# Allegro board CAD4.brd
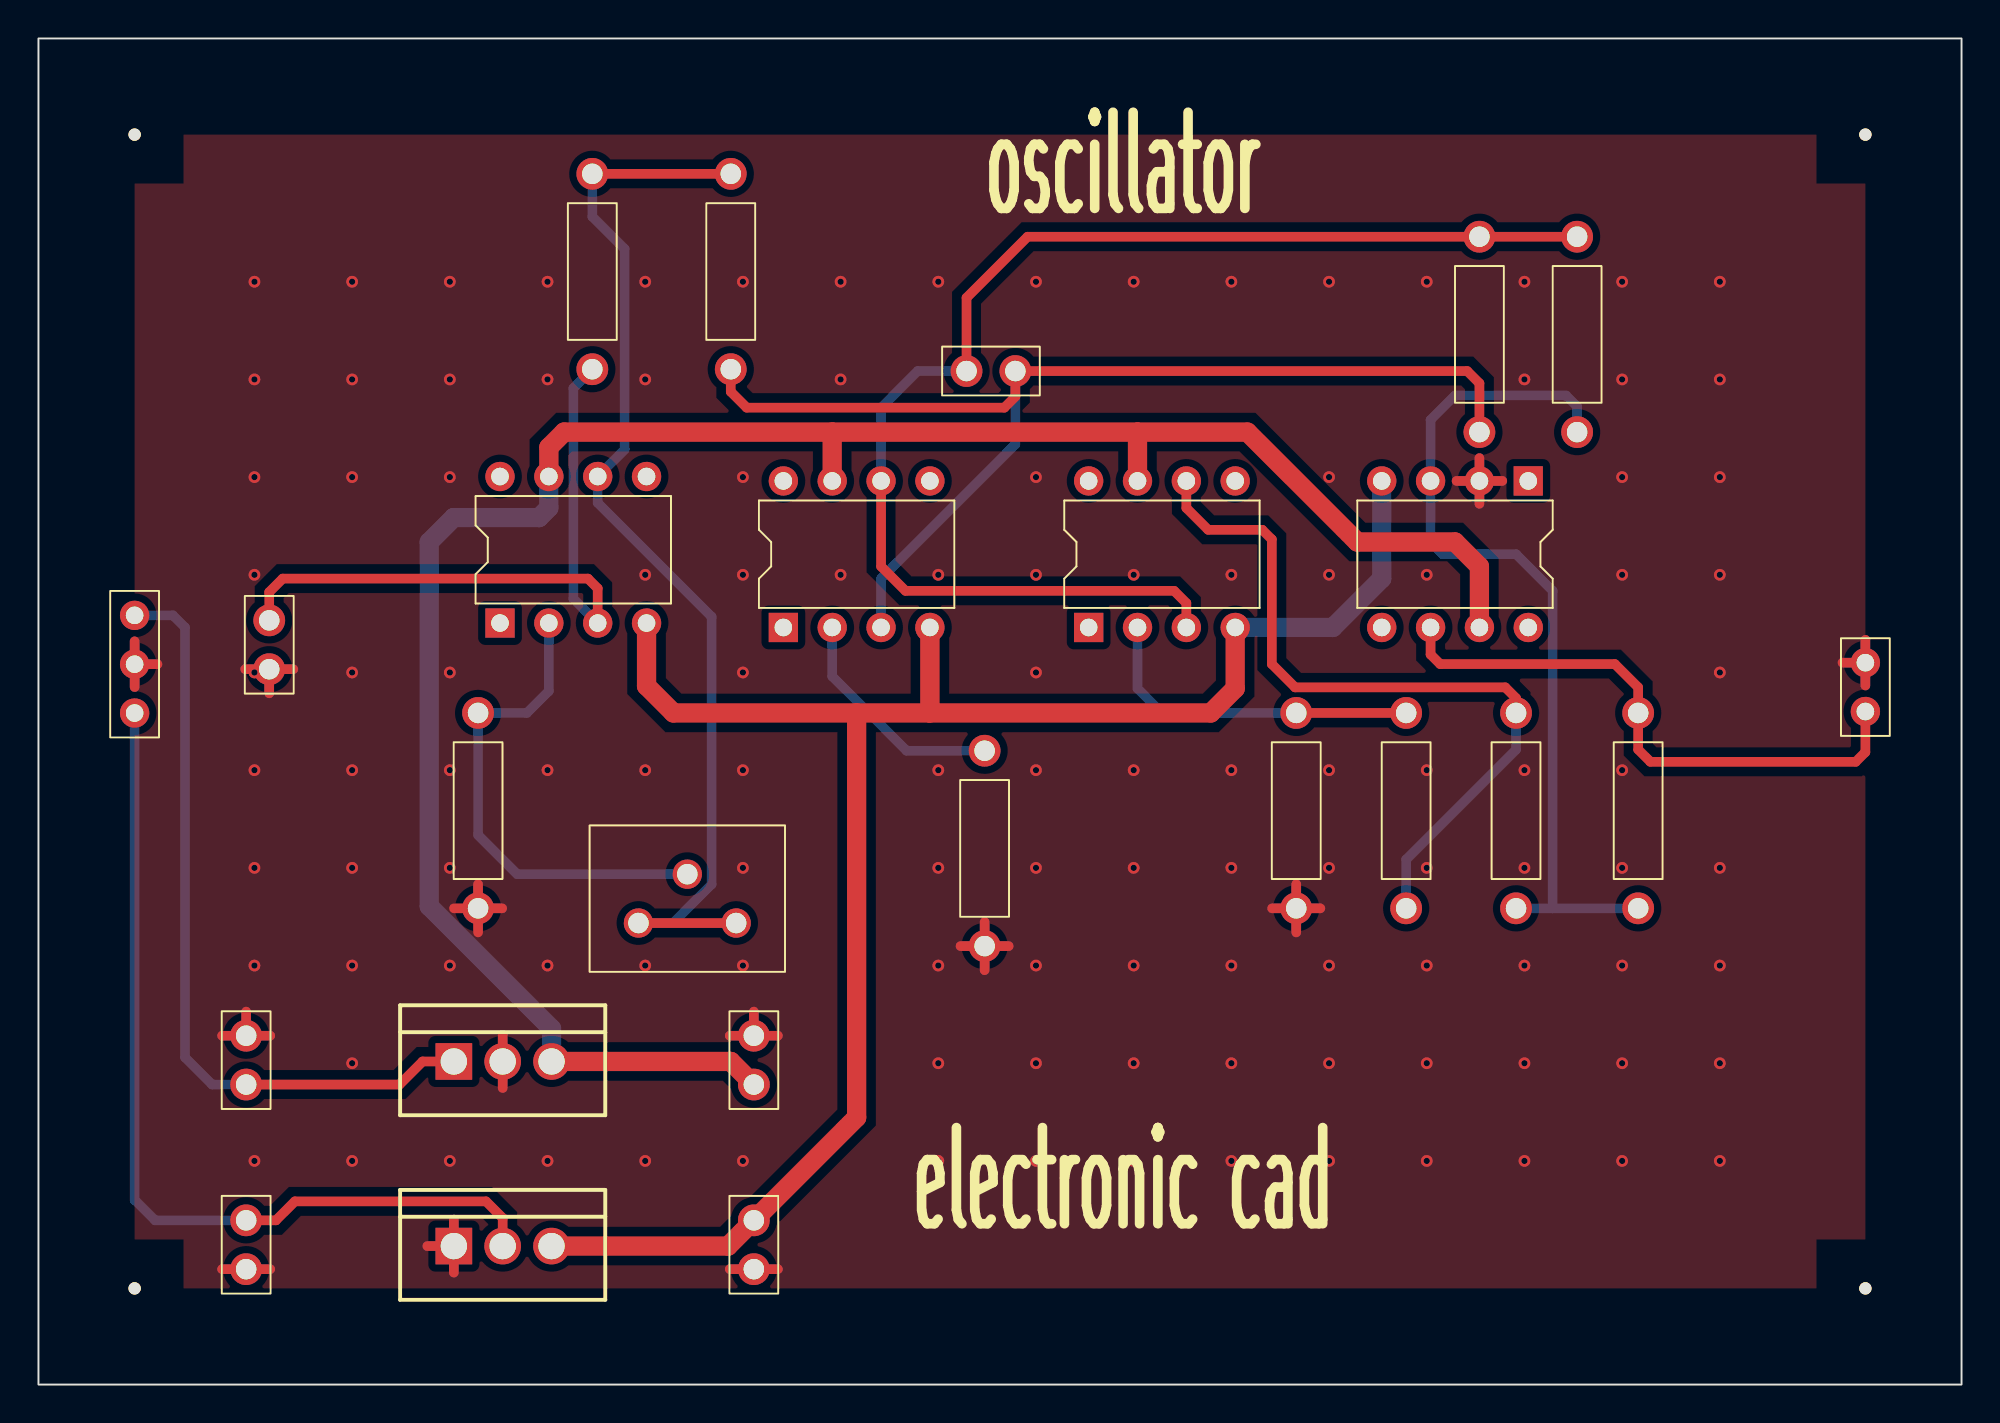
[diagram p0: board, top side]
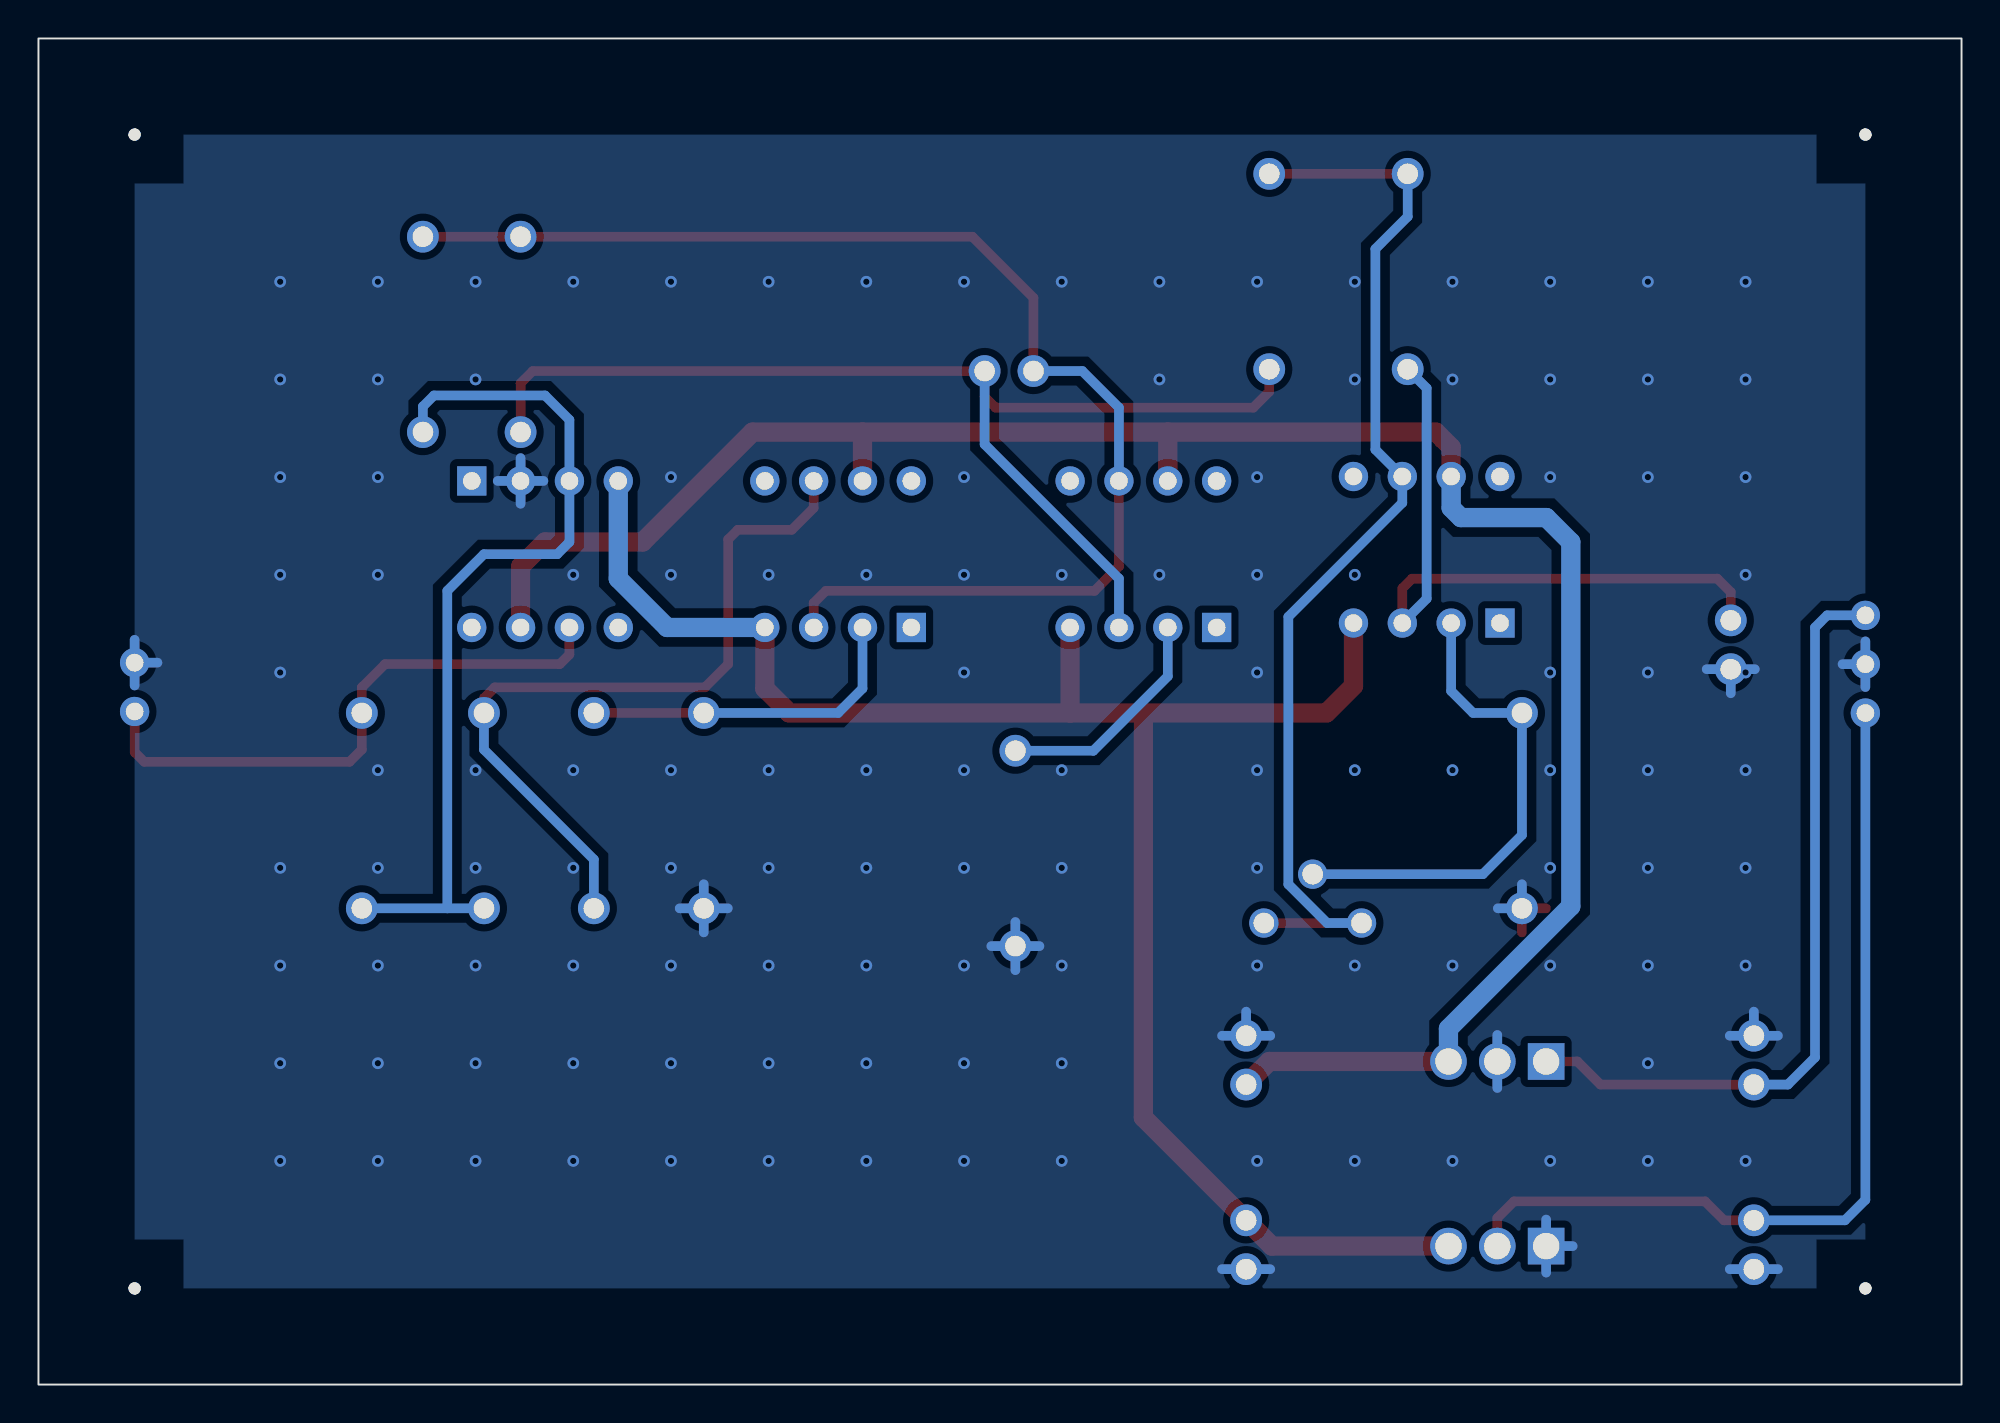
[diagram p1: board, bottom side, seen from below]

Outline 100 x 70 mm; copper layers: TOP, BOTTOM. Coordinates in mm from the lower left corner of the outline.
Outline path: rectangle 0,0 100,70

## Design rules (mm)
constraint set DEFAULT: min track width 0.5

## Placement (name value [footprint] x y rotation side)
C1  0.001uF  [CAPCK05]  50.8 52.7 90 top
C2  CAP NP  [CAPCK05]  12 37.2 0 top
C3  0.1uF  [CAPCK05]  10.8 15.6 0 top
C4  0.1uF  [CAPCK05]  37.2 15.6 0 top
C5  0.1uF  [CAPCK05]  10.8 6 0 top
C6  0.1uF  [CAPCK05]  37.2 6 0 top
J1  CON2  [JUMPER2]  95 35 90 top
J2  CON3  [JUMPER3]  5 40 270 top
NOREF  -  [unnamed]  5 5 0 top
NOREF#2  -  [#2]  100 0 90 top
NOREF#3  -  [#2]  0 70 0 top
NOREF#4  -  [unnamed]  5 65 0 top
NOREF#5  -  [unnamed]  95 5 0 top
NOREF#6  -  [unnamed]  95 65 0 top
R1  10K  [RES400]  28.8 52.8 0 top
R2  100K  [RES400]  74.93 49.53 0 top
R3  10K  [RES400]  80.01 59.69 180 top
R4  10K  [RES400]  83.19 24.77 0 top
R5  62K  [RES400]  36 52.8 0 top
R6  10K  [RES400]  49.2 22.8 0 top
R7  10K  [RES400]  76.83 24.77 0 top
R8  10K  [RES400]  22.86 34.92 180 top
R9  10K  [RES400]  71.12 24.77 0 top
R10  10K  [RES400]  65.41 34.92 180 top
U1  LF351  [DIP8_3]  24 39.6 90 top
U2  LF351  [DIP8_3]  38.73 39.37 90 top
U3  LF351  [DIP8_3]  54.61 39.37 90 top
U4  LF351  [DIP8_3]  77.47 46.99 270 top
U5  LM7812C  [TO220AB]  21.6 16.8 0 top
U6  LM7912C  [TO220AB]  21.6 7.2 0 top
VR1  1M  [POT]  31.2 24 0 top

## Library data of the parts
C1-C6 = CAP NP: Tolerance: ***; User Part Number: ***
J1 = CON2: User Part Number: ***
J2 = CON3: User Part Number: ***
R1-R10 = R: Tolerance: ***; User Part Number: ***
U1-U4 = LF351_3: Tolerance: ***; User Part Number: ***
U5 = LM7812C_0
U6 = LM7912C_0
VR1 = POT: User Part Number: ***

## Footprints (pads in the part's own frame, mm; a bottom-side part is the same pattern mirrored in y, then rotated)
CAPCK05
  round 1.651 hole 1.067: 1(0,0) 2(0,2.54)
DIP8_3
  rect 1.524x1.524 hole 0.914: 1(0,0)
  round 1.524 hole 0.914: 2(0,-2.54) 3(0,-5.08) 4(0,-7.62) 5(7.62,-7.62) 6(7.62,-5.08) 7(7.62,-2.54) 8(7.62,0)
JUMPER2
  round 1.524 hole 0.914: 1(0,0) 2(2.54,0)
JUMPER3
  round 1.524 hole 0.914: 1(0,0) 2(2.54,0) 3(5.08,0)
POT
  round 1.524 hole 1.067: 1(0,0) 2(5.08,0) 3(2.54,2.54)
RES400
  round 1.651 hole 1.067: 1(0,0) 2(0,10.16)
TO220AB
  rect 1.905x1.905 hole 1.372: 1(0,0)
  round 1.905 hole 1.372: 2(2.54,0) 3(5.08,0)
unnamed
  round 0.635 hole 3.175 unplated: (0,0)

## Nets
+VCC: C4.1 U1.7 U2.7 U3.7 U4.7 U5.3(VOUT)
-VCC: C6.2 U1.4(V-) U2.4(V-) U3.4(V-) U4.4(V-) U6.3(VOUT)
GND: C2.1 C3.2 C4.2 C5.1 C6.1 J1.2 J2.2 R6.1 R8.2 R10.2 U4.2 U5.2 U6.1
OUT: J1.1 R4.2 U4.6
SIG: C1.2 R2.2 R3.1 U2.6 U3.3
N00091: C2.2 R1.1 U1.3
N00193: R1.2 R5.2 U1.6 VR1.1 VR1.2(WIPER)
N00344: C1.1 R2.1 R5.1 U2.3
N00558: R6.2 U2.2
N01010: R9.2 R10.1 U3.2
N01107: R8.1 U1.2 VR1.3
N01295: R7.2 R9.1 U3.6
N01301: R3.2 R4.1 R7.1 U4.3
N02292: C3.1 J2.1 U5.1
N02314: C5.2 J2.3 U6.2

Pads without a net: U1 1 5 8; U2 1 5 8; U3 1 5 8; U4 1 5 8

## Via types
v1: diameter 0.61, hole 0.33, TOP to BOTTOM, 118 vias

## Routing (per net, layer and track width the routed paths; a pad name or vN(x,y) marks a point on that pad's centre or on a via; arc(x,y) is an arc through that point)
+VCC: length 110.6
  TOP w1: U2.7 41.27,49.53 ; 41.27,49.53 57.15,49.53 ; 41.27,49.53 27.33,49.53 26.54,48.74 U1.7 ; U5.3 36,16.8 C4.1 ; 57.15,49.53 62.87,49.53 68.58,43.82 73.66,43.82 74.93,42.55 U4.7 ; 57.15,49.53 U3.7
  BOTTOM w1: U5.3 26.68,18.51 20.32,24.87 20.32,43.81 21.59,45.09 26.04,45.09 26.54,45.59 U1.7
-VCC: length 96
  TOP w1: 46.35,34.92 U2.4 ; 46.35,34.92 42.55,34.92 ; 46.35,34.92 60.96,34.92 62.23,36.2 U3.4 ; U6.3 35.86,7.2 C6.2 42.55,13.88 42.55,34.92 ; 42.55,34.92 33.02,34.92 31.62,36.33 U1.4
  BOTTOM w1: U4.4 69.85,41.91 67.31,39.37 U3.4
GND: length 97.6
  TOP w0.5: 24.14,18.18 U5.2 24.14,15.42 ; 35.95,18.14 C4.2 ; C4.2 37.2,19.39 ; C4.2 38.45,18.14 ; 20.22,7.2 U6.1 ; U6.1 21.6,8.58 ; U6.1 21.6,5.82 ; R6.1 50.45,22.8 ; R6.1 47.95,22.8 ; R6.1 49.2,21.55 ; R6.1 49.2,24.05 ; 5,36.27 J2.2 ; J2.2 6.19,37.46 ; J2.2 5,38.65 ; 9.55,6 C5.1 12.05,6 ; 74.93,45.8 U4.2 ; U4.2 76.12,46.99 ; U4.2 74.93,48.18 ; U4.2 73.74,46.99 ; 65.41,23.51 R10.2 ; R10.2 65.41,26.02 ; R10.2 66.66,24.77 ; R10.2 64.15,24.77 ; 93.81,37.54 J1.2 ; J1.2 95,38.73 ; J1.2 95,36.35 ; 10.75,37.2 C2.1 ; C2.1 13.25,37.2 ; C2.1 12,35.95 ; 35.95,6 C6.1 38.45,6 ; R8.2 22.86,26.02 ; R8.2 22.86,23.51 ; R8.2 24.11,24.77 ; R8.2 21.61,24.77 ; 9.55,18.14 C3.2 ; C3.2 10.8,19.39 ; C3.2 12.05,18.14
  BOTTOM w0.5: J1.2 95,38.73 ; J1.2 95,36.35 ; J1.2 93.81,37.54 ; 38.45,6 C6.1 35.95,6 ; 24.11,24.77 R8.2 22.86,26.02 ; C4.2 37.2,19.39 ; C4.2 38.45,18.14 ; C4.2 35.95,18.14 ; R6.1 50.45,22.8 ; R6.1 49.2,21.55 ; R6.1 47.95,22.8 ; R6.1 49.2,24.05 ; 24.14,15.42 U5.2 24.14,18.18 ; 12.05,6 C5.1 9.55,6 ; U6.1 21.6,8.58 ; U6.1 21.6,5.82 ; U6.1 20.22,7.2 ; 10.75,37.2 C2.1 ; C2.1 13.25,37.2 ; C2.1 12,35.95 ; R10.2 66.66,24.77 ; R10.2 64.15,24.77 ; R10.2 65.41,26.02 ; R10.2 65.41,23.51 ; U4.2 74.93,48.18 ; U4.2 74.93,45.8 ; U4.2 73.74,46.99 ; U4.2 76.12,46.99 ; C3.2 10.8,19.39 ; C3.2 9.55,18.14 ; C3.2 12.05,18.14 ; J2.2 6.19,37.46 ; J2.2 5,36.27 ; J2.2 5,38.65
  vias: v1(11.23,57.35) v1(11.23,52.27) v1(11.23,47.19) v1(11.23,42.11) v1(11.23,37.03) v1(11.23,31.95) v1(11.23,26.87) v1(11.23,21.79) v1(11.23,11.63) v1(16.31,57.35) v1(16.31,52.27) v1(16.31,47.19) v1(16.31,37.03) v1(16.31,31.95) v1(16.31,26.87) v1(16.31,21.79) v1(16.31,16.71) v1(16.31,11.63) v1(21.39,57.35) v1(21.39,52.27) v1(21.39,47.19) v1(21.39,37.03) v1(21.39,31.95) v1(21.39,26.87) v1(21.39,21.79) v1(21.39,11.63) v1(26.47,57.35) v1(26.47,52.27) v1(26.47,31.95) v1(26.47,21.79) v1(26.47,11.63) v1(31.55,57.35) v1(31.55,52.27) v1(31.55,42.11) v1(31.55,31.95) v1(31.55,21.79) v1(31.55,11.63) v1(36.63,57.35) v1(36.63,47.19) v1(36.63,42.11) v1(36.63,37.03) v1(36.63,31.95) v1(36.63,26.87) v1(36.63,21.79) v1(36.63,11.63) v1(41.71,57.35) v1(41.71,52.27) v1(41.71,42.11) v1(46.79,57.35) v1(46.79,42.11) v1(46.79,31.95) v1(46.79,26.87) v1(46.79,21.79) v1(46.79,16.71) v1(46.79,11.63) v1(51.87,57.35) v1(51.87,47.19) v1(51.87,42.11) v1(51.87,37.03) v1(51.87,31.95) v1(51.87,26.87) v1(51.87,21.79) v1(51.87,16.71) v1(51.87,11.63) v1(56.95,57.35) v1(56.95,42.11) v1(56.95,31.95) v1(56.95,26.87) v1(56.95,21.79) v1(56.95,16.71) v1(56.95,11.63) v1(62.03,57.35) v1(62.03,42.11) v1(62.03,31.95) v1(62.03,26.87) v1(62.03,21.79) v1(62.03,16.71) v1(62.03,11.63) v1(67.11,57.35) v1(67.11,47.19) v1(67.11,42.11) v1(67.11,31.95) v1(67.11,26.87) v1(67.11,21.79) v1(67.11,16.71) v1(67.11,11.63) v1(72.19,57.35) v1(72.19,42.11) v1(72.19,31.95) v1(72.19,26.87) v1(72.19,21.79) v1(72.19,16.71) v1(72.19,11.63) v1(77.27,57.35) v1(77.27,52.27) v1(77.27,31.95) v1(77.27,26.87) v1(77.27,21.79) v1(77.27,16.71) v1(77.27,11.63) v1(82.35,57.35) v1(82.35,52.27) v1(82.35,47.19) v1(82.35,42.11) v1(82.35,31.95) v1(82.35,26.87) v1(82.35,21.79) v1(82.35,16.71) v1(82.35,11.63) v1(87.43,57.35) v1(87.43,52.27) v1(87.43,47.19) v1(87.43,42.11) v1(87.43,37.03) v1(87.43,26.87) v1(87.43,21.79) v1(87.43,16.71) v1(87.43,11.63)
OUT: length 30.5
  TOP w0.5: J1.1 95,32.89 94.5,32.38 83.82,32.38 83.19,33.02 R4.2 83.19,36.26 81.97,37.47 72.89,37.47 72.39,37.97 U4.6
SIG: length 68.3
  TOP w0.5: R3.1 R2.2 51.44,59.69 48.26,56.52 C1.2 ; U2.6 43.81,42.55 45.09,41.27 59.05,41.27 59.69,40.64 U3.3
  BOTTOM w0.5: C1.2 45.72,52.7 43.81,50.8 U2.6
N00091: length 35
  TOP w0.5: C2.2 12,41.21 12.7,41.91 28.57,41.91 29.08,41.4 U1.3
  BOTTOM w0.5: R1.1 27.81,51.81 27.81,40.87 U1.3
N00193: length 57.6
  TOP w0.5: R1.2 R5.2 ; VR1.1 VR1.2
  BOTTOM w0.5: VR1.1 32.99,24 35.01,26.02 35.01,39.92 29.08,45.85 U1.6 30.48,48.62 30.48,59.05 28.8,60.73 R1.2
N00344: length 61
  TOP w0.5: R5.1 36,51.63 36.83,50.8 50.23,50.8 50.8,51.38 C1.1 74.3,52.7 74.93,52.07 R2.1
  BOTTOM w0.5: U2.3 43.81,41.91 50.8,48.9 C1.1
N00558: length 12.1
  BOTTOM w0.5: U2.2 41.27,36.83 45.15,32.96 R6.2
N01010: length 17.7
  TOP w0.5: R9.2 R10.1
  BOTTOM w0.5: U3.2 57.15,36.19 58.42,34.92 R10.1
N01107: length 25.8
  BOTTOM w0.5: VR1.3 24.89,26.54 22.86,28.57 R8.1 25.4,34.92 26.54,36.06 U1.2
N01295: length 39.7
  TOP w0.5: R7.2 76.83,35.7 76.28,36.26 65.34,36.26 64.14,37.47 64.14,43.95 63.63,44.45 60.83,44.45 59.69,45.59 U3.6
  BOTTOM w0.5: R7.2 76.83,33.02 71.12,27.3 R9.1
N01301: length 46.3
  BOTTOM w0.5: R3.2 80.01,50.86 79.44,51.44 73.66,51.44 72.39,50.16 U4.3 72.39,43.81 73.02,43.18 76.84,43.18 78.74,41.28 78.74,24.77 ; R7.1 78.74,24.77 ; 78.74,24.77 R4.1
N02292: length 40.3
  TOP w0.5: C3.1 18.78,15.6 19.98,16.8 U5.1
  BOTTOM w0.5: C3.1 9.03,15.6 7.62,17.01 7.62,39.37 6.99,40 J2.1
N02314: length 47.1
  TOP w0.5: C5.2 12.35,8.54 13.34,9.53 23.27,9.53 24.14,8.66 U6.2
  BOTTOM w0.5: J2.3 5,9.61 6.07,8.54 C5.2

## Copper pours and planes (outline as drawn; the poured copper is in the pictures)
GND on TOP: 95,5 5,5 5,65 95,65
GND on BOTTOM: 5,5 5,65 95,65 95,5 ; 2 cut-outs

## Text on the board
Ref Des/Silkscreen Top: oscillator | electronic cad
DIMENSION: FIGURE | FINISHED_SIZE | 0.914 | 1.067 | 1.372 | 3.175 | DRILL CHART: TOP to BOTTOM | ALL UNITS ARE IN MILLIMETERS | PLATED | NON-PLATED | QTY | 37 | 35 | 6 | 4
